# EAGLE board Keyboard_Scanner_LC_thruhole (EAGLE 9.5.0)
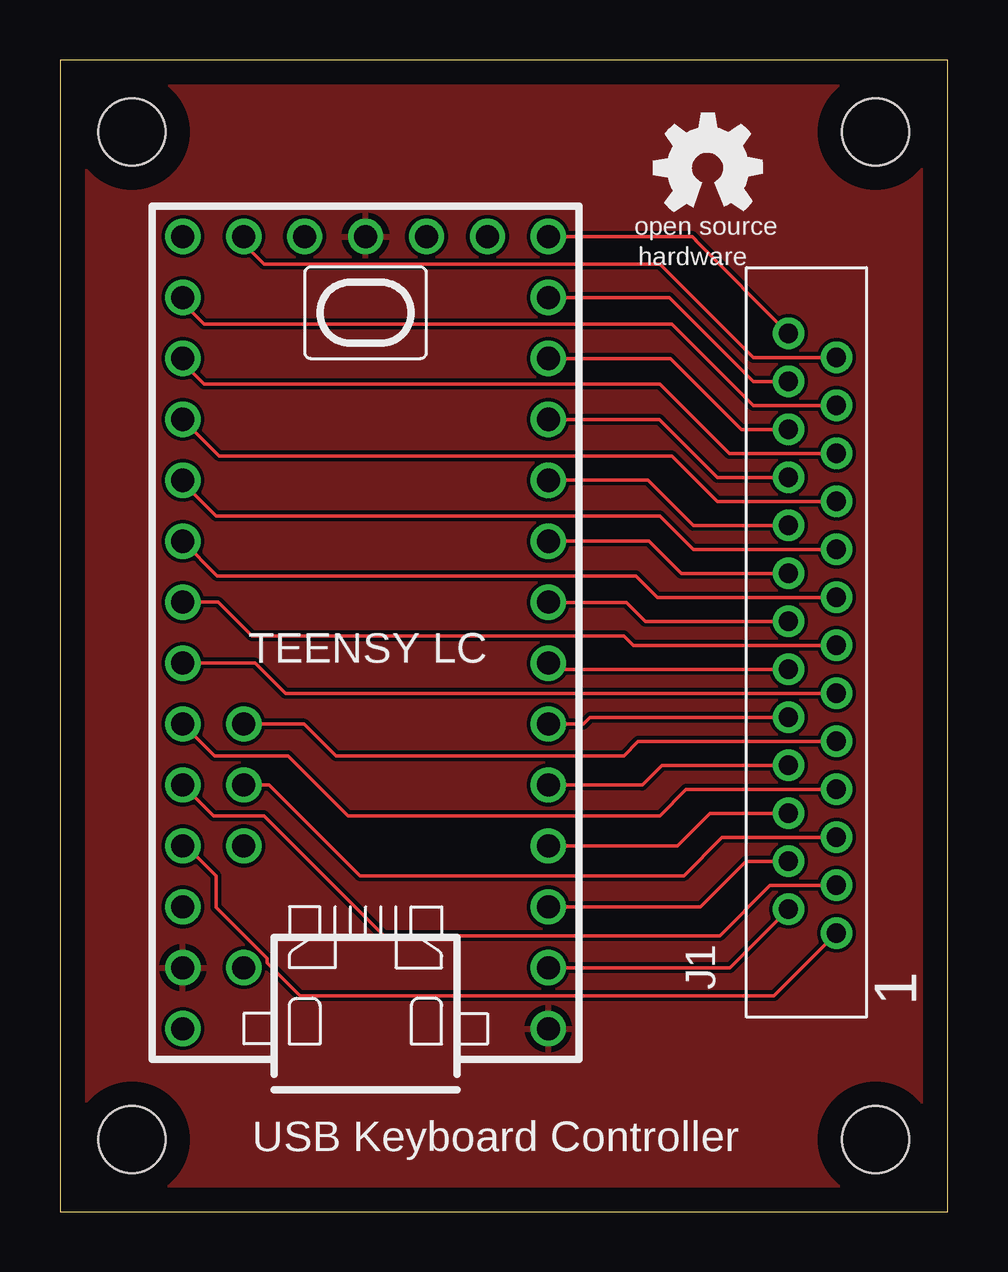
[diagram p0: board, top side]
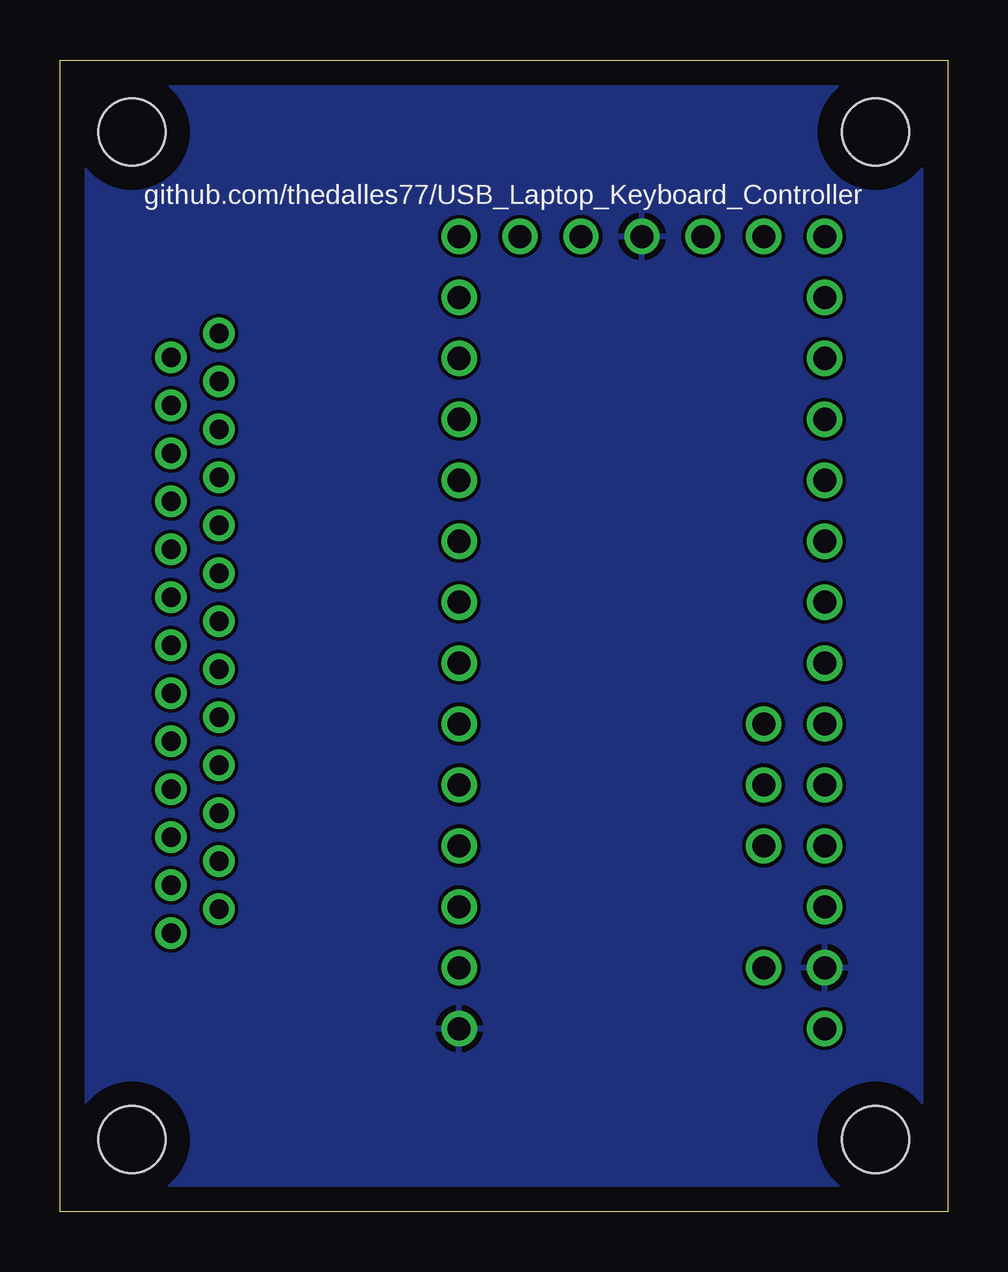
[diagram p1: board, bottom side, seen from below]

Size 37 x 48 mm. Coordinates in mm from the lower left corner, seen from the top.
Outline: 0,0 37,0 37,48 0,48 0,0
Copper layers (1*16): Top 0.035mm / dielectric 1.5mm / Bottom 0.035mm
Design rules "default": minimum track width 6mil, minimum drill 0.35mm, track to track 6mil, track to pad 6mil, pad to pad 6mil, via to via 6mil, smd to smd 6mil, copper to edge 40mil, drill to drill 6mil, minimum pad ring 10mil, minimum via ring 8mil, stop-mask expansion 4mil, vias tented up to drill 0mil, thermal gap 10mil
Holes 2.8 mm at 3,3 3,45 34,3 34,45

## Footprints (pad centres in the part's own frame; a part is rotated, then mirrored left to right if it is on the bottom)
T1200_CON = drill 0.8: P$1 0,0; P$2 1,2; P$3 2,0; P$4 3,2; P$5 4,0; P$6 5,2; P$7 6,0; P$8 7,2; P$9 8,0; P$10 9,2; P$11 10,0; P$12 11,2; P$13 12,0; P$14 13,2; P$15 14,0; P$16 15,2; P$17 16,0; P$18 17,2; P$19 18,0; P$20 19,2; P$21 20,0; P$22 21,2; P$23 22,0; P$24 23,2; P$25 24,0; P$26 25,2
TEENSY_LC = drill 0.965: 0 -13.97,-7.62; 1 -11.43,-7.62; 2 -8.89,-7.62; 3 -6.35,-7.62; 3V1 -11.43,7.62; 3V2 16.51,-2.54; 4 -3.81,-7.62; 5 -1.27,-7.62; 5V -16.51,7.62; 6 1.27,-7.62; 7 3.81,-7.62; 8 6.35,-7.62; 9 8.89,-7.62; 10 11.43,-7.62; 11 13.97,-7.62; 12 16.51,-7.62; 13 16.51,7.62; 14 13.97,7.62; 15 11.43,7.62; 16 8.89,7.62; 17 6.35,7.62; 18 3.81,7.62; 19 1.27,7.62; 20 -1.27,7.62; 21 -3.81,7.62; 22 -6.35,7.62; 23 -8.89,7.62; 24 -6.35,5.08; 25 -3.81,5.08; 26 16.51,5.08; AREF -8.89,5.08; GND1 -16.51,-7.62; GND2 -13.97,7.62; GND3 16.51,0; PGM 16.51,2.54; VIN 16.51,-5.08; VUSB -13.97,5.08

## Placement (x,y rotation side)
J1  1.00MM DIP FPC  [T1200_CON]  32.37,11.6 90 top
U$1  TEENSY_LC  [TEENSY_LC]  12.74,24.13 90 top
U$2  [OSHW_5MM]  27,43.5 0 top

## Library data of the parts
J1 = 1.0MM DIP FPC26
U$1 = Teensy_LC
U$2 = oshw

## Nets
GND: U$1.GND1 U$1.GND2 U$1.GND3
IO_0: J1.P$2 U$1.0
IO_1: J1.P$4 U$1.1
IO_2: J1.P$6 U$1.2
IO_3: J1.P$8 U$1.3
IO_4: J1.P$10 U$1.4
IO_5: J1.P$12 U$1.5
IO_6: J1.P$14 U$1.6
IO_7: J1.P$16 U$1.7
IO_8: J1.P$18 U$1.8
IO_9: J1.P$20 U$1.9
IO_10: J1.P$22 U$1.10
IO_11: J1.P$24 U$1.11
IO_12: J1.P$26 U$1.12
IO_14: J1.P$23 U$1.14
IO_15: J1.P$21 U$1.15
IO_16: J1.P$19 U$1.16
IO_17: J1.P$17 U$1.17
IO_18: J1.P$15 U$1.18
IO_19: J1.P$13 U$1.19
IO_20: J1.P$11 U$1.20
IO_21: J1.P$7 U$1.21
IO_22: J1.P$3 U$1.22
IO_23: J1.P$1 U$1.23
IO_24: J1.P$5 U$1.24
IO_25: J1.P$9 U$1.25
IO_26: J1.P$25 U$1.26

## Tracks (layer width: path | path; a pad name or v marks a point on that pad's centre or on a via)
GND
  pour Top: 0,0 0,48 37,48 37,0
  pour Bottom: 0,0 0,48 37,48 37,0
IO_0
  Top 0.152: J1.P$2 27.93,10.16 U$1.0
IO_1
  Top 0.152: J1.P$4 28.6,14.6 26.7,12.7 U$1.1
IO_2
  Top 0.152: J1.P$6 27.1,16.6 25.74,15.24 U$1.2
IO_3
  Top 0.152: J1.P$8 25.1,18.6 24.28,17.78 U$1.3
IO_4
  Top 0.152: J1.P$10 22.1,20.6 21.82,20.32 U$1.4
IO_5
  Top 0.152: J1.P$12 20.62,22.6 U$1.5
IO_6
  Top 0.152: U$1.6 20.38,25.38 23.62,25.38 24.4,24.6 J1.P$14
IO_7
  Top 0.152: J1.P$16 25.9,26.6 24.56,27.94 U$1.7
IO_8
  Top 0.152: J1.P$18 26.4,28.6 24.52,30.48 U$1.8
IO_9
  Top 0.152: J1.P$20 27.4,30.6 24.98,33.02 U$1.9
IO_10
  Top 0.152: J1.P$22 28.4,32.6 25.44,35.56 U$1.10
IO_11
  Top 0.152: J1.P$24 28.9,34.6 25.4,38.1 U$1.11
IO_12
  Top 0.152: J1.P$26 26.5,40.47 26.5,40.5 26.36,40.64 U$1.12
IO_14
  Top 0.152: J1.P$23 28.9,33.6 25.5,37 6,37 5.12,37.88 U$1.14
IO_15
  Top 0.152: J1.P$21 27.9,31.6 25,34.5 6,34.5 5.12,35.38 U$1.15
IO_16
  Top 0.152: J1.P$19 27.4,29.6 25.5,31.5 6.64,31.5 U$1.16
IO_17
  Top 0.152: J1.P$17 26.4,27.6 25,29 6.5,29 5.12,30.38 U$1.17
IO_18
  Top 0.152: J1.P$15 24.9,25.6 24,26.5 6.56,26.5 U$1.18
IO_19
  Top 0.152: J1.P$13 23.9,23.6 23.5,24 8,24 6.6,25.4 U$1.19
IO_20
  Top 0.152: J1.P$11 9.4,21.6 8.14,22.86 U$1.20
IO_21
  Top 0.152: J1.P$7 26.1,17.6 25,16.5 12,16.5 9.5,19 6.44,19 U$1.21
IO_22
  Top 0.152: J1.P$3 29.6,13.6 27.5,11.5 13.5,11.5 8.5,16.5 6.4,16.5 U$1.22
IO_23
  Top 0.152: J1.P$1 29.77,9 10,9 8.62,10.38 8.62,10.56 6.5,12.69 6.5,14 5.26,15.24 U$1.23
IO_24
  Top 0.152: J1.P$5 27.6,15.6 26,14 12.5,14 8.72,17.78 U$1.24
IO_25
  Top 0.152: J1.P$9 24.1,19.6 23.5,19 11.5,19 10.18,20.32 U$1.25
IO_26
  Top 0.152: J1.P$25 28.9,35.6 25,39.5 8.5,39.5 7.66,40.34 U$1.26

## Text on the board
tPlace: 1 | USB Keyboard Controller
bPlace: github.com/thedalles77/USB_Laptop_Keyboard_Controller